# Altium PCB Board.PcbDoc
Units mm, origin at the board's own origin, x right, y up, seen from the top; angles counter-clockwise.
Board outline 284 x 207.87 mm, 4 copper layers (Top Layer, Int1 (GND), Int2 (PWR), Bottom Layer), stack 1.369 mm thick; 2 components, 114 nets, 289 pads, 0 vias.
Unrouted connection lines stored in the file: 146.
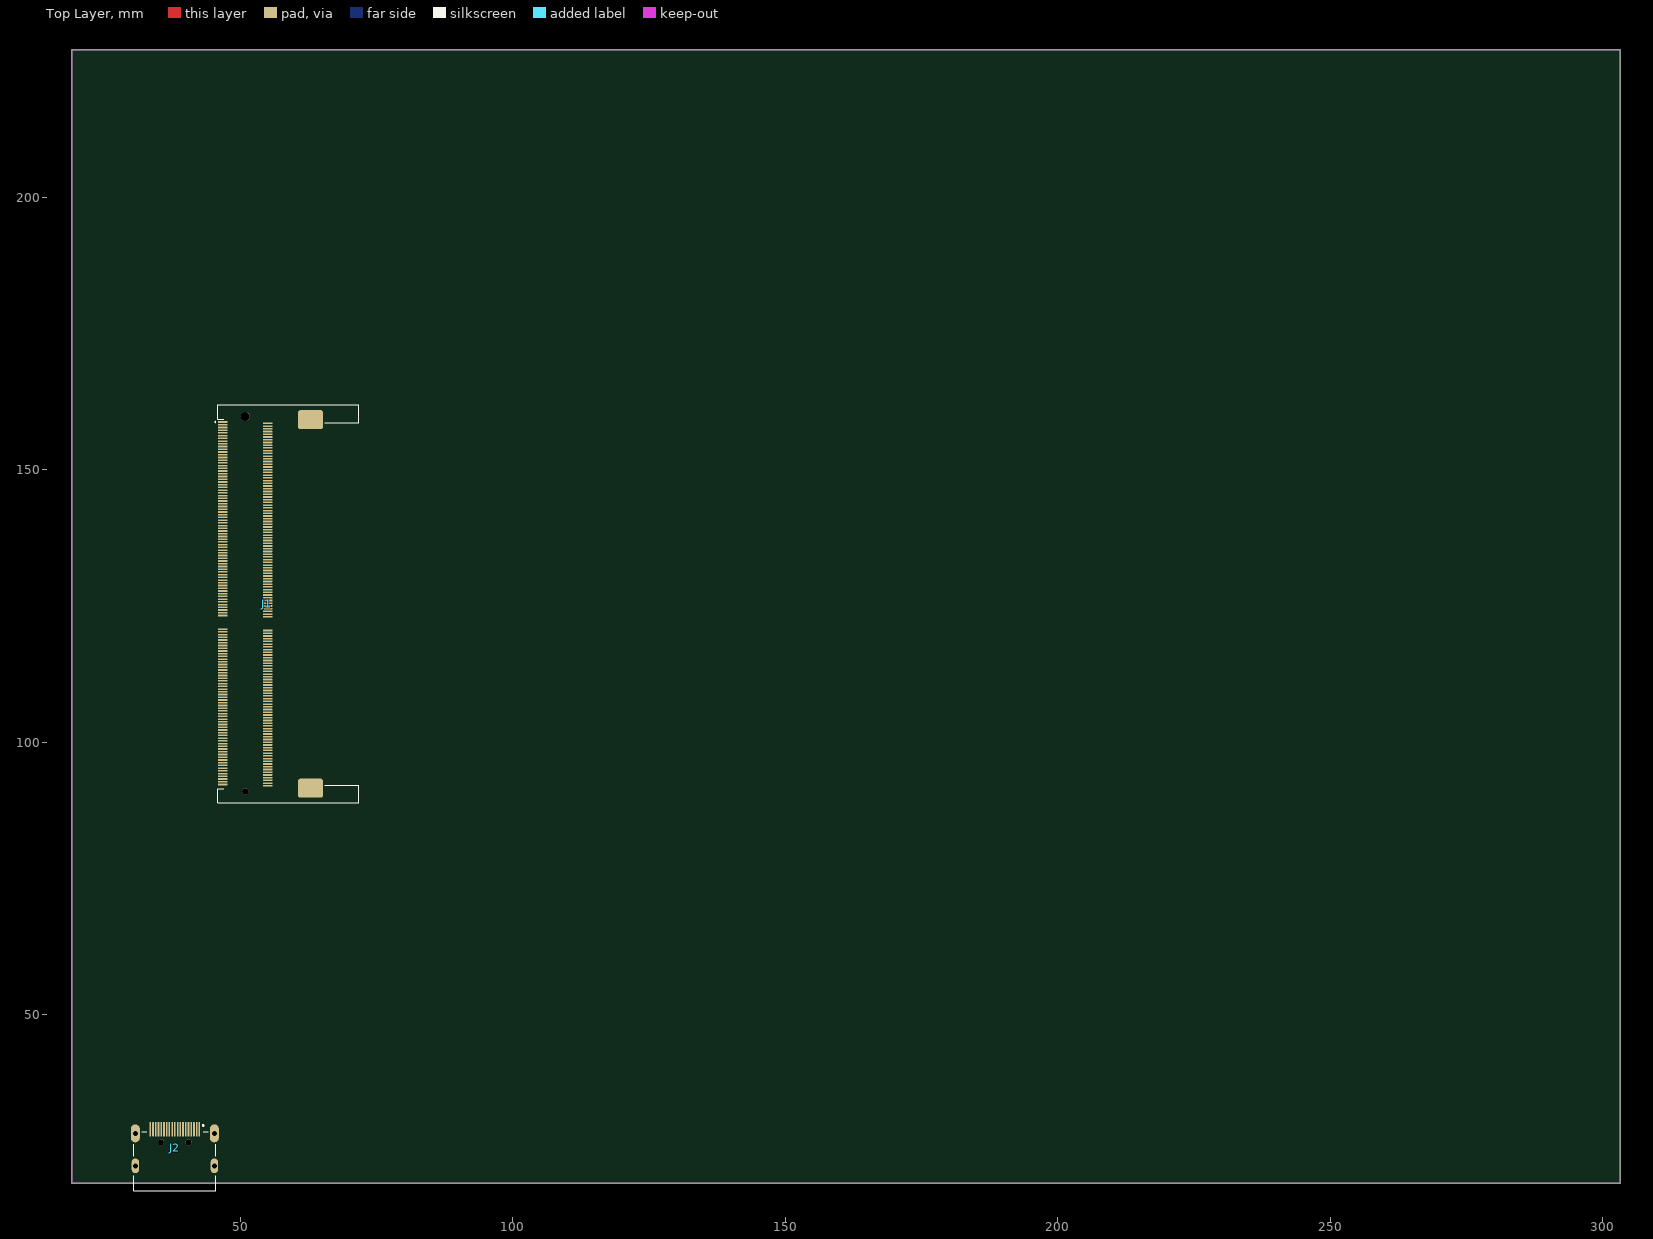
[diagram p0: Top Layer view]
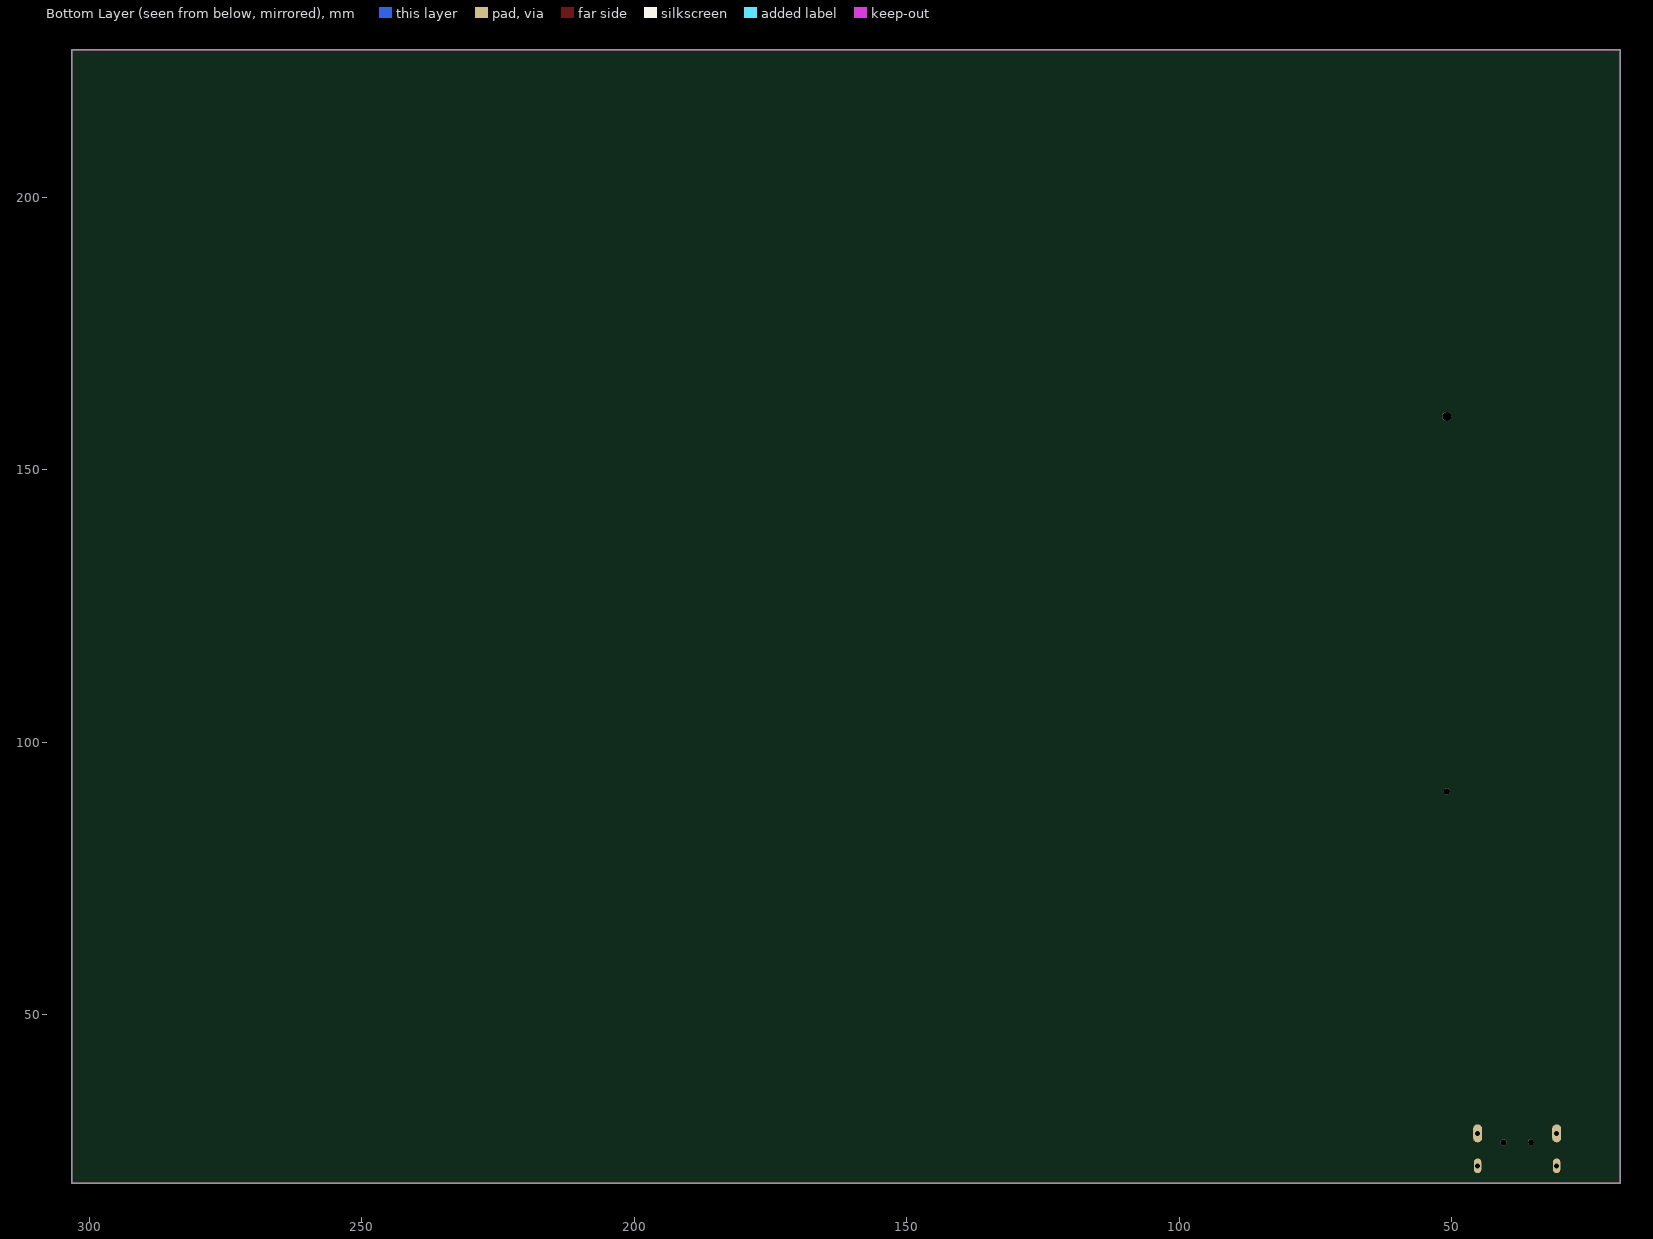
[diagram p1: Bottom Layer view, seen from below]
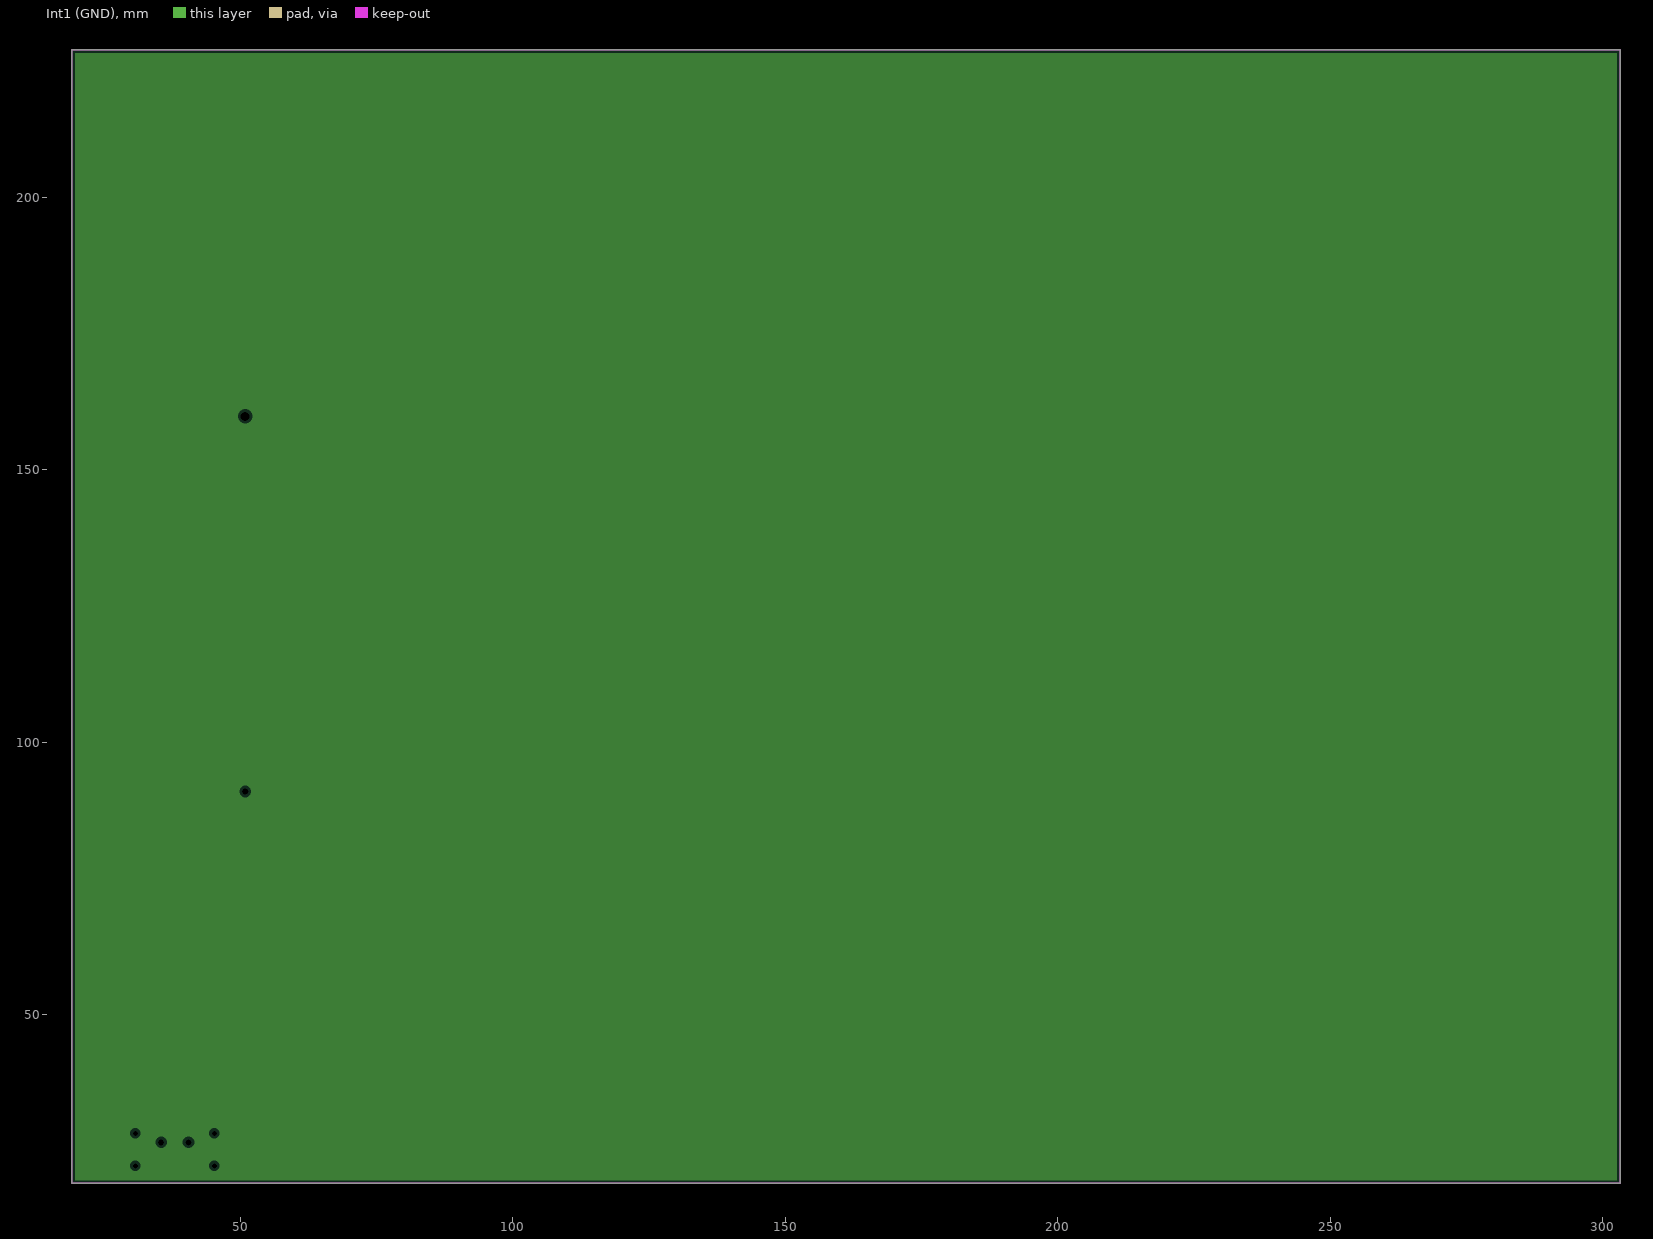
[diagram p2: Int1 (GND), clearances drawn from the general rule]
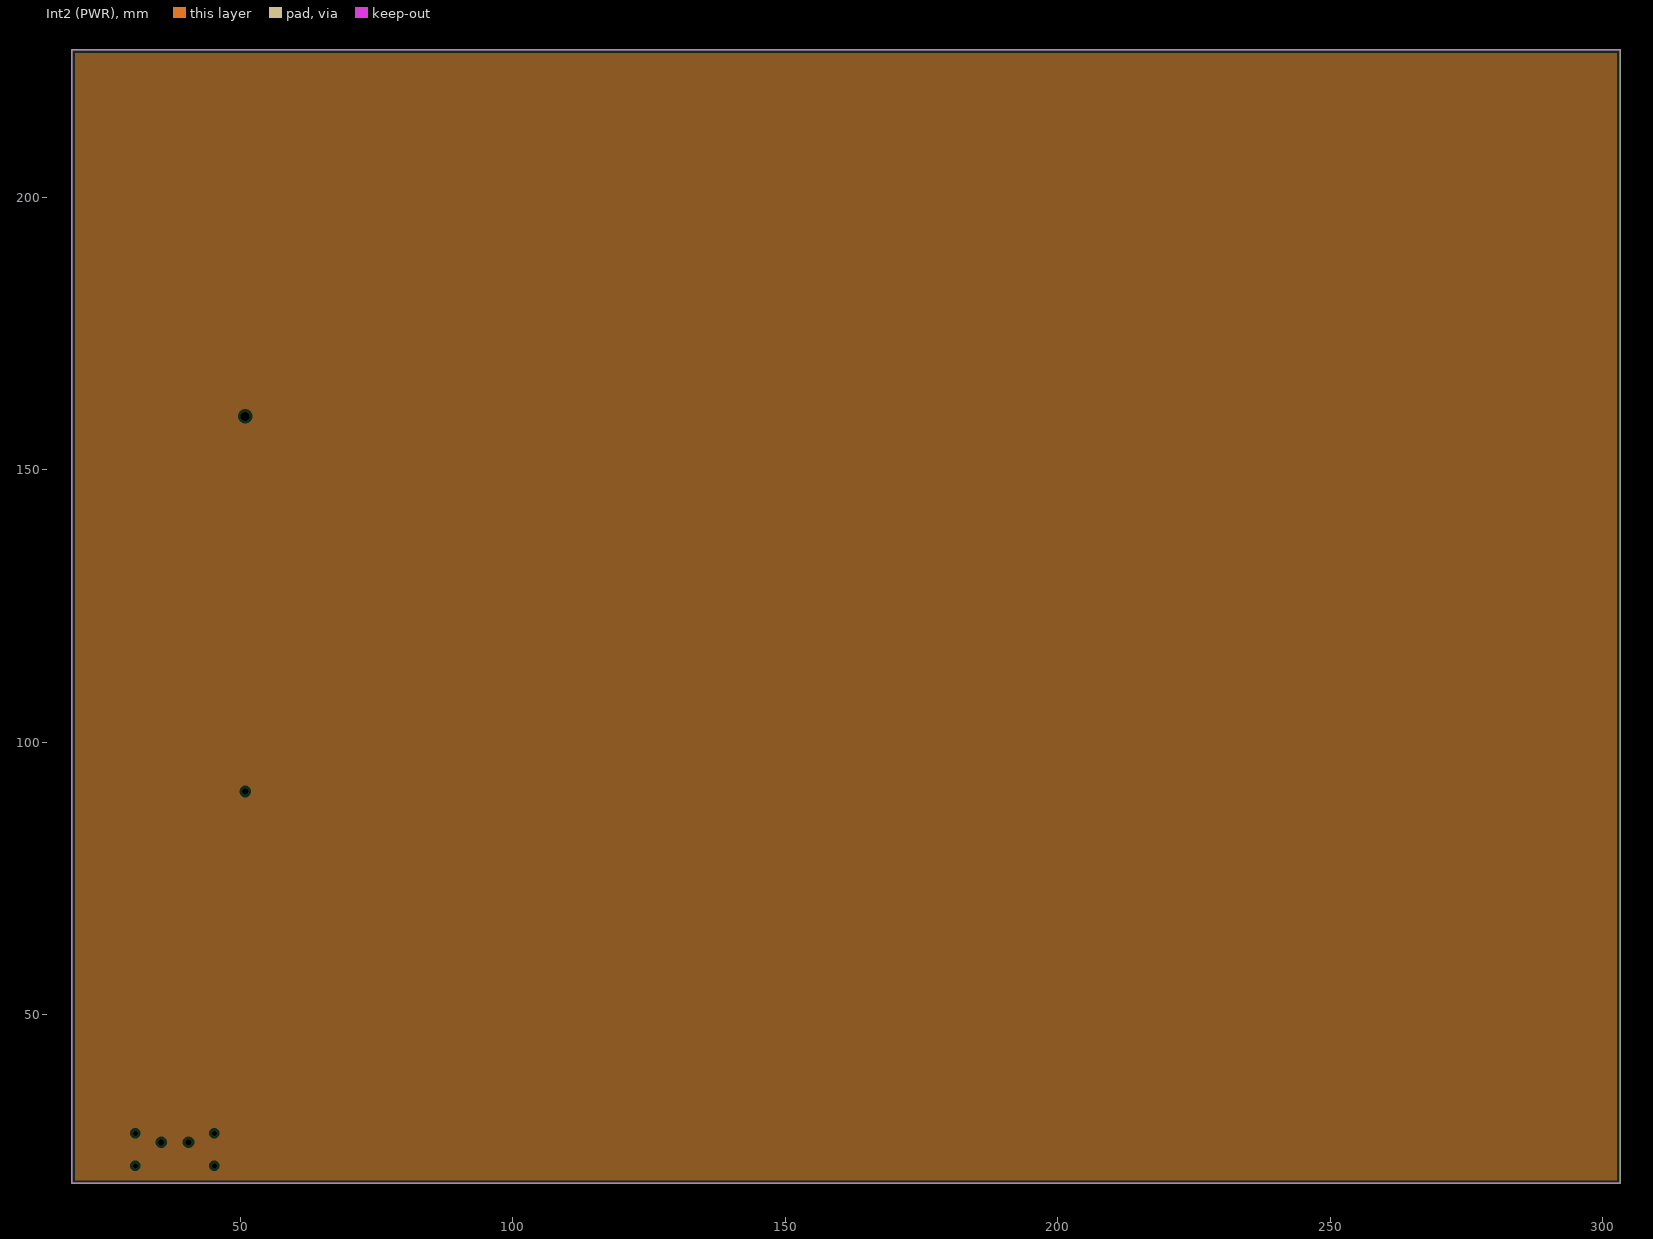
[diagram p3: Int2 (PWR), clearances drawn from the general rule]

## Layer stack, top to bottom
Top Solder: solder mask 0.0254, SM-001, Dk 4
Top Layer: signal copper 0.035
Dielectric 1: prepreg 0.1295, PP-017, Dk 4.3
Dielectric 2: prepreg 0.1295, PP-017, Dk 4.3
Int1 (GND): plane copper 0.035
Dielectric 3: core 0.7112, Core-039, Dk 4.8
Int2 (PWR): plane copper 0.035
Dielectric 4: prepreg 0.1295, PP-017, Dk 4.3
Dielectric 5: prepreg 0.1295, PP-017, Dk 4.3
Bottom Layer: signal copper 0.035
Bottom Solder: solder mask 0.0254, SM-001, Dk 4

## Board outline
19.127,19.127 303.127,19.127 303.127,227 19.127,227

## Design rules (kind name [scope] priority, off if disabled: settings)
Clearance [All] p1: gap=0.254 ignorepadtopadclearanceinfootprint=TRUE except(0: Arc-Hole Track-Hole SMDPad-Hole THPad-Hole Via-Hole Fill-Hole Poly-Hole Region-Hole Text-Hole)
DiffPairsRouting "Schematic Differential Pairs Routing_4" [InNetClass('USB')] p1: maxlimit=0.152 minlimit=0.152 mostfreqgap=0.152 toplayer_minwidth=0.109 toplayer_maxwidth=0.109 toplayer_prefwidth=0.109 bottomlayer_minwidth=0.109 bottomlayer_maxwidth=0.109 bottomlayer_prefwidth=0.109 maxuncoupledlength=12.7
DiffPairsRouting "Schematic Differential Pairs Routing_3" [InDifferentialPairClass('HDMI_TXC')] p2: maxlimit=0.152 minlimit=0.152 mostfreqgap=0.152 toplayer_minwidth=0.109 toplayer_maxwidth=0.109 toplayer_prefwidth=0.109 bottomlayer_minwidth=0.109 bottomlayer_maxwidth=0.109 bottomlayer_prefwidth=0.109 maxuncoupledlength=12.7
DiffPairsRouting "Schematic Differential Pairs Routing_2" [InDifferentialPairClass('HDMI_TX0')] p3: maxlimit=0.152 minlimit=0.152 mostfreqgap=0.152 toplayer_minwidth=0.109 toplayer_maxwidth=0.109 toplayer_prefwidth=0.109 bottomlayer_minwidth=0.109 bottomlayer_maxwidth=0.109 bottomlayer_prefwidth=0.109 maxuncoupledlength=12.7
DiffPairsRouting "Schematic Differential Pairs Routing_1" [InDifferentialPairClass('HDMI_TX2')] p4: maxlimit=0.152 minlimit=0.152 mostfreqgap=0.152 toplayer_minwidth=0.109 toplayer_maxwidth=0.109 toplayer_prefwidth=0.109 bottomlayer_minwidth=0.109 bottomlayer_maxwidth=0.109 bottomlayer_prefwidth=0.109 maxuncoupledlength=12.7
DiffPairsRouting "Schematic Differential Pairs Routing" [InDifferentialPairClass('HDMI_TX1')] p5: maxlimit=0.152 minlimit=0.152 mostfreqgap=0.152 toplayer_minwidth=0.109 toplayer_maxwidth=0.109 toplayer_prefwidth=0.109 bottomlayer_minwidth=0.109 bottomlayer_maxwidth=0.109 bottomlayer_prefwidth=0.109 maxuncoupledlength=12.7
DiffPairsRouting [All] p6: maxlimit=0.254 minlimit=0.254 mostfreqgap=0.254 toplayer_minwidth=0.381 toplayer_maxwidth=0.381 toplayer_prefwidth=0.381 bottomlayer_minwidth=0.381 bottomlayer_maxwidth=0.381 bottomlayer_prefwidth=0.381 maxuncoupledlength=12.7
PlaneClearance [All] p1: clearance=0.508
PlaneConnect [All] p1: planeconnectstyle=Relief reliefexpansion=0.508 reliefentries=4 reliefconductorwidth=0.254 reliefairgap=0.254
PolygonConnect [All] p1: connectstyle=Relief reliefconductorwidth=0.254 reliefentries=4 polygonreliefangle="90 Angle" airgapwidth=0.254
RoutingVias [All] p1: holewidth=0.711 width=1.27 viastyle="Through Hole" minholewidth=0.711 minwidth=1.27 maxholewidth=0.711 maxwidth=1.27
SolderMaskExpansion [All] p1: expansion=0.102 istentingtop=FALSE
Width "Schematic Width Constraint_1" [InNet('HDMI_SCL')] p1: maxlimit=0.127 minlimit=0.127 preferedwidth=0.127
Width "Schematic Width Constraint" [InNetClass('RGMII')] p2: maxlimit=0.127 minlimit=0.127 preferedwidth=0.127
Width [All] p3: maxlimit=0.254 minlimit=0.254 preferedwidth=0.254
27 further rules are at their usual default settings.

## Classes and differential pairs
differential pair class USB3: USB3
differential pair class USB2: USB2
differential pair class USB1: USB1
differential pair class USB0: USB0
differential pair class HDMI_TXC: HDMI_TXC
differential pair class HDMI_TX2: HDMI_TX2
differential pair class HDMI_TX1: HDMI_TX1
differential pair class HDMI_TX0: HDMI_TX0
net class USB: USB0_N USB0_P USB1_N USB1_P USB2_N USB2_P USB3_N USB3_P
net class RGMII: RGMII_CLKIN RGMII_MDC RGMII_MDIO RGMII_RX0 RGMII_RX1 RGMII_RX2 RGMII_RX3 RGMII_RXCK RGMII_RXCTL RGMII_TXCK RGMII_TXCTL RGMII_TXD0 RGMII_TXD1 RGMII_TXD2 RGMII_TXD3
net class HDMI: HDMI_CEC HDMI_HPD HDMI_SCL HDMI_SDA HDMI_TX0_N HDMI_TX0_P HDMI_TX1_N HDMI_TX1_P HDMI_TX2_N HDMI_TX2_P HDMI_TXC_N HDMI_TXC_P
net class GPIO: CSI_D0 CSI_D1 CSI_D2 CSI_D3 CSI_D4 CSI_D5 CSI_D6 CSI_D7 CSI_HSYNC CSI_MCLK CSI_PCLK CSI_SCK CSI_SDA CSI_VSYNC I2C0_SCL I2C0_SDA I2S0_CLK I2S0_DIN I2S0_DOUT I2S0_SYNC JTAG_CK JTAG_DI JTAG_DO JTAG_MS LINEIN_L LINEIN_R LINEOUT_L LINEOUT_R MICIN1_N MICIN1_P MICIN2_N MICIN2_P PA4 PA17 PE14 PE15 PF6 PG11 PG12 PG13 SDC1_CLK SDC1_CMD SDC1_D0 SDC1_D1 SDC1_D2 SDC1_D3 SIM_DATA SIM_PWREN SIM_RST SPI1_CLK SPI1_CS SPI1_MISO SPI1_MOSI TVOUT UART0_RX UART0_TX UART1_RX UART1_TX UART2_RTS UART2_RX UART2_TX UBOOT
net class CSI: CSI_D0 CSI_D1 CSI_D2 CSI_D3 CSI_D4 CSI_D5 CSI_D6 CSI_D7 CSI_HSYNC CSI_MCLK CSI_PCLK CSI_SCK CSI_SDA CSI_VSYNC
component class 02_HDMI: J2
component class 01_COREBOARD: J1
differential pair USB3: +USB3_P -USB3_N
differential pair USB2: +USB2_P -USB2_N
differential pair USB1: +USB1_P -USB1_N
differential pair USB0: +USB0_P -USB0_N
differential pair HDMI_TXC: +HDMI_TXC_P -HDMI_TXC_N
differential pair HDMI_TX2: +HDMI_TX2_P -HDMI_TX2_N
differential pair HDMI_TX1: +HDMI_TX1_P -HDMI_TX1_N
differential pair HDMI_TX0: +HDMI_TX0_P -HDMI_TX0_N

## Components (designator, comment, footprint, x,y, rotation, side; value= is the part's Value field where it differs from the comment)
J1 "DDR4_SODIMM" DDR4_SODIMM 50.9,121.875 r270 top
J2 "HDMI" HDMI_1827059_3 38,24 r0 top

## Footprints (in the part's own frame and the unit in brackets; to place one, negate y for a bottom-side part, rotate by r counter-clockwise, add the part's x,y. Pads: shape width x height; smd on the part's side, far side on the other; paste and mask are expansions set on the pad)
DDR4_SODIMM [mm]
  rrect25% 0.3x1.75 smd: 1(-36.875,-4.1) 2(-36.625,4.1) 3(-36.375,-4.1) 4(-36.125,4.1) 5(-35.875,-4.1) 6(-35.625,4.1) 7(-35.375,-4.1) 8(-35.125,4.1) 9(-34.875,-4.1) 10(-34.625,4.1) 11(-34.375,-4.1) 12(-34.125,4.1) 13(-33.875,-4.1) 14(-33.625,4.1) 15(-33.375,-4.1) 16(-33.125,4.1) 17(-32.875,-4.1) 18(-32.625,4.1) 19(-32.375,-4.1) 20(-32.125,4.1) 21(-31.875,-4.1) 22(-31.625,4.1) 23(-31.375,-4.1) 24(-31.125,4.1) 25(-30.875,-4.1) 26(-30.625,4.1) 27(-30.375,-4.1) 28(-30.125,4.1) 29(-29.875,-4.1) 30(-29.625,4.1) 31(-29.375,-4.1) 32(-29.125,4.1) 33(-28.875,-4.1) 34(-28.625,4.1) 35(-28.375,-4.1) 36(-28.125,4.1) 37(-27.875,-4.1) 38(-27.625,4.1) 39(-27.375,-4.1) 40(-27.125,4.1) 41(-26.875,-4.1) 42(-26.625,4.1) 43(-26.375,-4.1) 44(-26.125,4.1) 45(-25.875,-4.1) 46(-25.625,4.1) 47(-25.375,-4.1) 48(-25.125,4.1) 49(-24.875,-4.1) 50(-24.625,4.1) 51(-24.375,-4.1) 52(-24.125,4.1) 53(-23.875,-4.1) 54(-23.625,4.1) 55(-23.375,-4.1) 56(-23.125,4.1) 57(-22.875,-4.1) 58(-22.625,4.1) 59(-22.375,-4.1) 60(-22.125,4.1) 61(-21.875,-4.1) 62(-21.625,4.1) 63(-21.375,-4.1) 64(-21.125,4.1) 65(-20.875,-4.1) 66(-20.625,4.1) 67(-20.375,-4.1) 68(-20.125,4.1) 69(-19.875,-4.1) 70(-19.625,4.1) 71(-19.375,-4.1) 72(-19.125,4.1) 73(-18.875,-4.1) 74(-18.625,4.1) 75(-18.375,-4.1) 76(-18.125,4.1) 77(-17.875,-4.1) 78(-17.625,4.1) 79(-17.375,-4.1) 80(-17.125,4.1) 81(-16.875,-4.1) 82(-16.625,4.1) 83(-16.375,-4.1) 84(-16.125,4.1) 85(-15.875,-4.1) 86(-15.625,4.1) 87(-15.375,-4.1) 88(-15.125,4.1) 89(-14.875,-4.1) 90(-14.625,4.1) 91(-14.375,-4.1) 92(-14.125,4.1) 93(-13.875,-4.1) 94(-13.625,4.1) 95(-13.375,-4.1) 96(-13.125,4.1) 97(-12.875,-4.1) 98(-12.625,4.1) 99(-12.375,-4.1) 100(-12.125,4.1) 101(-11.875,-4.1) 102(-11.625,4.1) 103(-11.375,-4.1) 104(-11.125,4.1) 105(-10.875,-4.1) 106(-10.625,4.1) 107(-10.375,-4.1) 108(-10.125,4.1) 109(-9.875,-4.1) 110(-9.625,4.1) 111(-9.375,-4.1) 112(-9.125,4.1) 113(-8.875,-4.1) 114(-8.625,4.1) 115(-8.375,-4.1) 116(-8.125,4.1) 117(-7.875,-4.1) 118(-7.625,4.1) 119(-7.375,-4.1) 120(-7.125,4.1) 121(-6.875,-4.1) 122(-6.625,4.1) 123(-6.375,-4.1) 124(-6.125,4.1) 125(-5.875,-4.1) 126(-5.625,4.1) 127(-5.375,-4.1) 128(-5.125,4.1) 129(-4.875,-4.1) 130(-4.625,4.1) 131(-4.375,-4.1) 132(-4.125,4.1) 133(-3.875,-4.1) 134(-3.625,4.1) 135(-3.375,-4.1) 136(-3.125,4.1) 137(-2.875,-4.1) 138(-2.625,4.1) 139(-2.375,-4.1) 140(-2.125,4.1) 141(-1.875,-4.1) 142(-1.625,4.1) 143(-1.375,-4.1) 144(-1.125,4.1) 145(1.125,-4.1) 146(1.375,4.1) 147(1.625,-4.1) 148(1.875,4.1) 149(2.125,-4.1) 150(2.375,4.1) 151(2.625,-4.1) 152(2.875,4.1) 153(3.125,-4.1) 154(3.375,4.1) 155(3.625,-4.1) 156(3.875,4.1) 157(4.125,-4.1) 158(4.375,4.1) 159(4.625,-4.1) 160(4.875,4.1) 161(5.125,-4.1) 162(5.375,4.1) 163(5.625,-4.1) 164(5.875,4.1) 165(6.125,-4.1) 166(6.375,4.1) 167(6.625,-4.1) 168(6.875,4.1) 169(7.125,-4.1) 170(7.375,4.1) 171(7.625,-4.1) 172(7.875,4.1) 173(8.125,-4.1) 174(8.375,4.1) 175(8.625,-4.1) 176(8.875,4.1) 177(9.125,-4.1) 178(9.375,4.1) 179(9.625,-4.1) 180(9.875,4.1) 181(10.125,-4.1) 182(10.375,4.1) 183(10.625,-4.1) 184(10.875,4.1) 185(11.125,-4.1) 186(11.375,4.1) 187(11.625,-4.1) 188(11.875,4.1) 189(12.125,-4.1) 190(12.375,4.1) 191(12.625,-4.1) 192(12.875,4.1) 193(13.125,-4.1) 194(13.375,4.1) 195(13.625,-4.1) 196(13.875,4.1) 197(14.125,-4.1) 198(14.375,4.1) 199(14.625,-4.1) 200(14.875,4.1) 201(15.125,-4.1) 202(15.375,4.1) 203(15.625,-4.1) 204(15.875,4.1) 205(16.125,-4.1) 206(16.375,4.1) 207(16.625,-4.1) 208(16.875,4.1) 209(17.125,-4.1) 210(17.375,4.1) 211(17.625,-4.1) 212(17.875,4.1) 213(18.125,-4.1) 214(18.375,4.1) 215(18.625,-4.1) 216(18.875,4.1) 217(19.125,-4.1) 218(19.375,4.1) 219(19.625,-4.1) 220(19.875,4.1) 221(20.125,-4.1) 222(20.375,4.1) 223(20.625,-4.1) 224(20.875,4.1) 225(21.125,-4.1) 226(21.375,4.1) 227(21.625,-4.1) 228(21.875,4.1) 229(22.125,-4.1) 230(22.375,4.1) 231(22.625,-4.1) 232(22.875,4.1) 233(23.125,-4.1) 234(23.375,4.1) 235(23.625,-4.1) 236(23.875,4.1) 237(24.125,-4.1) 238(24.375,4.1) 239(24.625,-4.1) 240(24.875,4.1) 241(25.125,-4.1) 242(25.375,4.1) 243(25.625,-4.1) 244(25.875,4.1) 245(26.125,-4.1) 246(26.375,4.1) 247(26.625,-4.1) 248(26.875,4.1) 249(27.125,-4.1) 250(27.375,4.1) 251(27.625,-4.1) 252(27.875,4.1) 253(28.125,-4.1) 254(28.375,4.1) 255(28.625,-4.1) 256(28.875,4.1) 257(29.125,-4.1) 258(29.375,4.1) 259(29.625,-4.1) 260(29.875,4.1)
  rrect25% 3.5x4.6 smd: S1(-37.3,12) S2(30.3,12)
  round 1.65 hole 1.65 unplated: ""(-37.9,0)
  round 1.15 hole 1.15 unplated: ""(30.9,0)
  silkscreen extent -40,-5.6 33,20.85, body extent -39.93,-4.89 33.07,29.46, height 4.81
HDMI_1827059_3 [mm] "EMBOSS PACKAGE HDMI CONN SMT NO-FLANGE T"
  rrect25% 0.3x2.6 smd: 1(4.5,5) 2(4,5) 3(3.5,5) 4(3,5) 5(2.5,5) 6(2,5) 7(1.5,5) 8(1,5) 9(0.5,5) 10(0,5) 11(-0.5,5) 12(-1,5) 13(-1.5,5) 14(-2,5) 15(-2.5,5) 16(-3,5) 17(-3.5,5) 18(-4,5) 19(-4.5,5)
  oval 1.65x3.3 hole 0.9: S1(7.25,4.24) S2(-7.25,4.24)
  oval 1.35x2.7 hole 0.9: S3(-7.25,-1.72) S4(7.25,-1.72)
  round 1.1 hole 1.1 unplated: ""(-2.5,2.59) ""(2.5,2.59)
  silkscreen extent -7.5,-6.31 7.5,5.86, body extent -7.5,-6.35 7.5,5.75, height 6.08

## Nets (pads, with @x,y where several pads share a name; then routed paths per layer and width w, separated by ;. In a path a pad name is that pad's centre, name@x,y a point inside that pad or via, vN(x,y) a via of type N, cw(c..) or ccw(c..) an arc to the next point about the centre after c; other vN are vias at no path point)
CSI_D0: J1.105
CSI_D1: J1.125
CSI_D2: J1.46
CSI_D3: J1.48
CSI_D4: J1.101
CSI_D5: J1.97
CSI_D6: J1.123
CSI_D7: J1.53
CSI_HSYNC: J1.59
CSI_MCLK: J1.57
CSI_PCLK: J1.61
CSI_SCK: J1.51
CSI_SDA: J1.113
CSI_VSYNC: J1.103
DCDC4: J1.239 J1.241 J1.243
DLDO1: J1.257 J1.259
DLDO2: J1.251 J1.253 J1.255
DLDO3: J1.245 J1.247 J1.249
DLDO4: J1.233 J1.235 J1.237
ELDO1: J1.230 J1.232 J1.234
ELDO2: J1.222 J1.224 J1.226
ELDO3: J1.214 J1.216 J1.218 J1.220
GND: J1.1 J1.5 J1.8 J1.9 J1.12 J1.13 J1.16 J1.17 J1.20 J1.21 J1.24 J1.25 J1.28 J1.32 J1.36 J1.40 J1.44 J1.50 J1.56 J1.62 J1.63 J1.65 J1.68 J1.74 J1.76 J1.82 J1.84 J1.86 J1.88 J1.90 J1.92 J1.94 J1.96 J1.98 J1.100 J1.102 J1.108 J1.114 J1.120 J1.126 J1.130 J1.131 J1.133 J1.134 J1.135 J1.137 J1.138 J1.139 J1.141 J1.142 J1.143 J1.144 J1.145 J1.147 J1.149 J1.150 J1.151 J1.153 J1.155 J1.156 J1.157 J1.159 J1.161 J1.162 J1.163 J1.165 J1.167 J1.168 J1.169 J1.170 J1.171 J1.172 J1.173 J1.174 J1.175 J1.176 J1.177 J1.178 J1.179 J1.180 J1.181 J1.182 J1.183 J1.184 J1.185 J1.186 J1.188 J1.190 J1.192 J1.194 J1.196 J1.198 J1.200 J1.202 J1.204 J1.206 J1.208 J1.210 J1.219 J1.221 J1.223 J1.225 J1.227 J1.229 J1.231 J1.238 J1.240 J1.242 J1.244 J1.246 J1.248 J1.250 J1.252 J1.254 J1.256 J1.258 J1.260
HDMI_CEC: J1.132
HDMI_HPD: J1.140
HDMI_SCL: J1.128
HDMI_SDA: J1.136
HDMI_TX0_N: J1.110
HDMI_TX0_P: J1.112
HDMI_TX1_N: J1.116
HDMI_TX1_P: J1.118
HDMI_TX2_N: J1.124
HDMI_TX2_P: J1.122
HDMI_TXC_N: J1.106
HDMI_TXC_P: J1.104
I2C0_SCL: J1.78
I2C0_SDA: J1.55
I2S0_CLK: J1.43
I2S0_DIN: J1.41
I2S0_DOUT: J1.45
I2S0_SYNC: J1.47
JTAG_CK: J1.35
JTAG_DI: J1.37
JTAG_DO: J1.39
JTAG_MS: J1.33
LED_DISK: J1.4
LED_ERROR: J1.6
LED_IDENT: J1.2
LINEIN_L: J1.166
LINEIN_R: J1.164
LINEOUT_L: J1.154
LINEOUT_R: J1.158
MICIN1_N: J1.146
MICIN1_P: J1.160
MICIN2_N: J1.152
MICIN2_P: J1.148
NTC: J1.228
PA4: J1.81
PA17: J1.49
PE14: J1.115
PE15: J1.117
PF6: J1.27
PG11: J1.77
PG12: J1.79
PG13: J1.71
PWR_KEY: J1.236
PWR_OK: J1.212
RGMII_CLKIN: J1.18
RGMII_MDC: J1.14
RGMII_MDIO: J1.10
RGMII_RX0: J1.26
RGMII_RX1: J1.38
RGMII_RX2: J1.22
RGMII_RX3: J1.34
RGMII_RXCK: J1.42
RGMII_RXCTL: J1.30
RGMII_TXCK: J1.19
RGMII_TXCTL: J1.3
RGMII_TXD0: J1.11
RGMII_TXD1: J1.7
RGMII_TXD2: J1.23
RGMII_TXD3: J1.15
SDC1_CLK: J1.83
SDC1_CMD: J1.109
SDC1_D0: J1.107
SDC1_D1: J1.69
SDC1_D2: J1.73
SDC1_D3: J1.75
SIM_DATA: J1.85
SIM_PWREN: J1.91
SIM_RST: J1.95
SPI1_CLK: J1.80
SPI1_CS: J1.89
SPI1_MISO: J1.93
SPI1_MOSI: J1.87
TVOUT: J1.127
UART0_RX: J1.29
UART0_TX: J1.31
UART1_RX: J1.67
UART1_TX: J1.129
UART2_RTS: J1.121
UART2_RX: J1.119
UART2_TX: J1.99
UBOOT: J1.111
USB0_N: J1.66
USB0_P: J1.64
USB1_N: J1.72
USB1_P: J1.70
USB2_N: J1.58
USB2_P: J1.60
USB3_N: J1.52
USB3_P: J1.54
VCC-5V: J1.203 J1.205 J1.207 J1.209 J1.211 J1.213 J1.215 J1.217
VCC-BAT: J1.187 J1.189 J1.191 J1.193 J1.195 J1.197 J1.199 J1.201
pads on no net: J1. J1.S1 J1.S2 J2. J2.1 J2.2 J2.3 J2.4 J2.5 J2.6 J2.7 J2.8 J2.9 J2.10 J2.11 J2.12 J2.13 J2.14 J2.15 J2.16 J2.17 J2.18 J2.19 J2.S1 J2.S2 J2.S3 J2.S4

## Polygon pours and split planes (outlines as drawn)
no net on Int1 (GND) (split plane): 302.617,19.637 19.637,19.637 19.637,226.49 302.617,226.49
no net on Int2 (PWR) (split plane): 302.617,19.637 19.637,19.637 19.637,226.49 302.617,226.49

## Keep-outs
Keep-Out Layer:
  the board outline again, w0.254